# Altium PCB PCB1.PcbDoc (part 2 of 4)
Units mm, origin at the board's own origin, x right, y up, seen from the top; angles counter-clockwise.
Board outline 49 x 49 mm, 8 copper layers (L1(SIG), L2(GND), L3(SIG), L4(GND), L5(PWR), L6(PWR), L7(GND), L8(SIG)), stack 1.6 mm thick; 175 components, 123 nets, 646 pads, 355 vias.
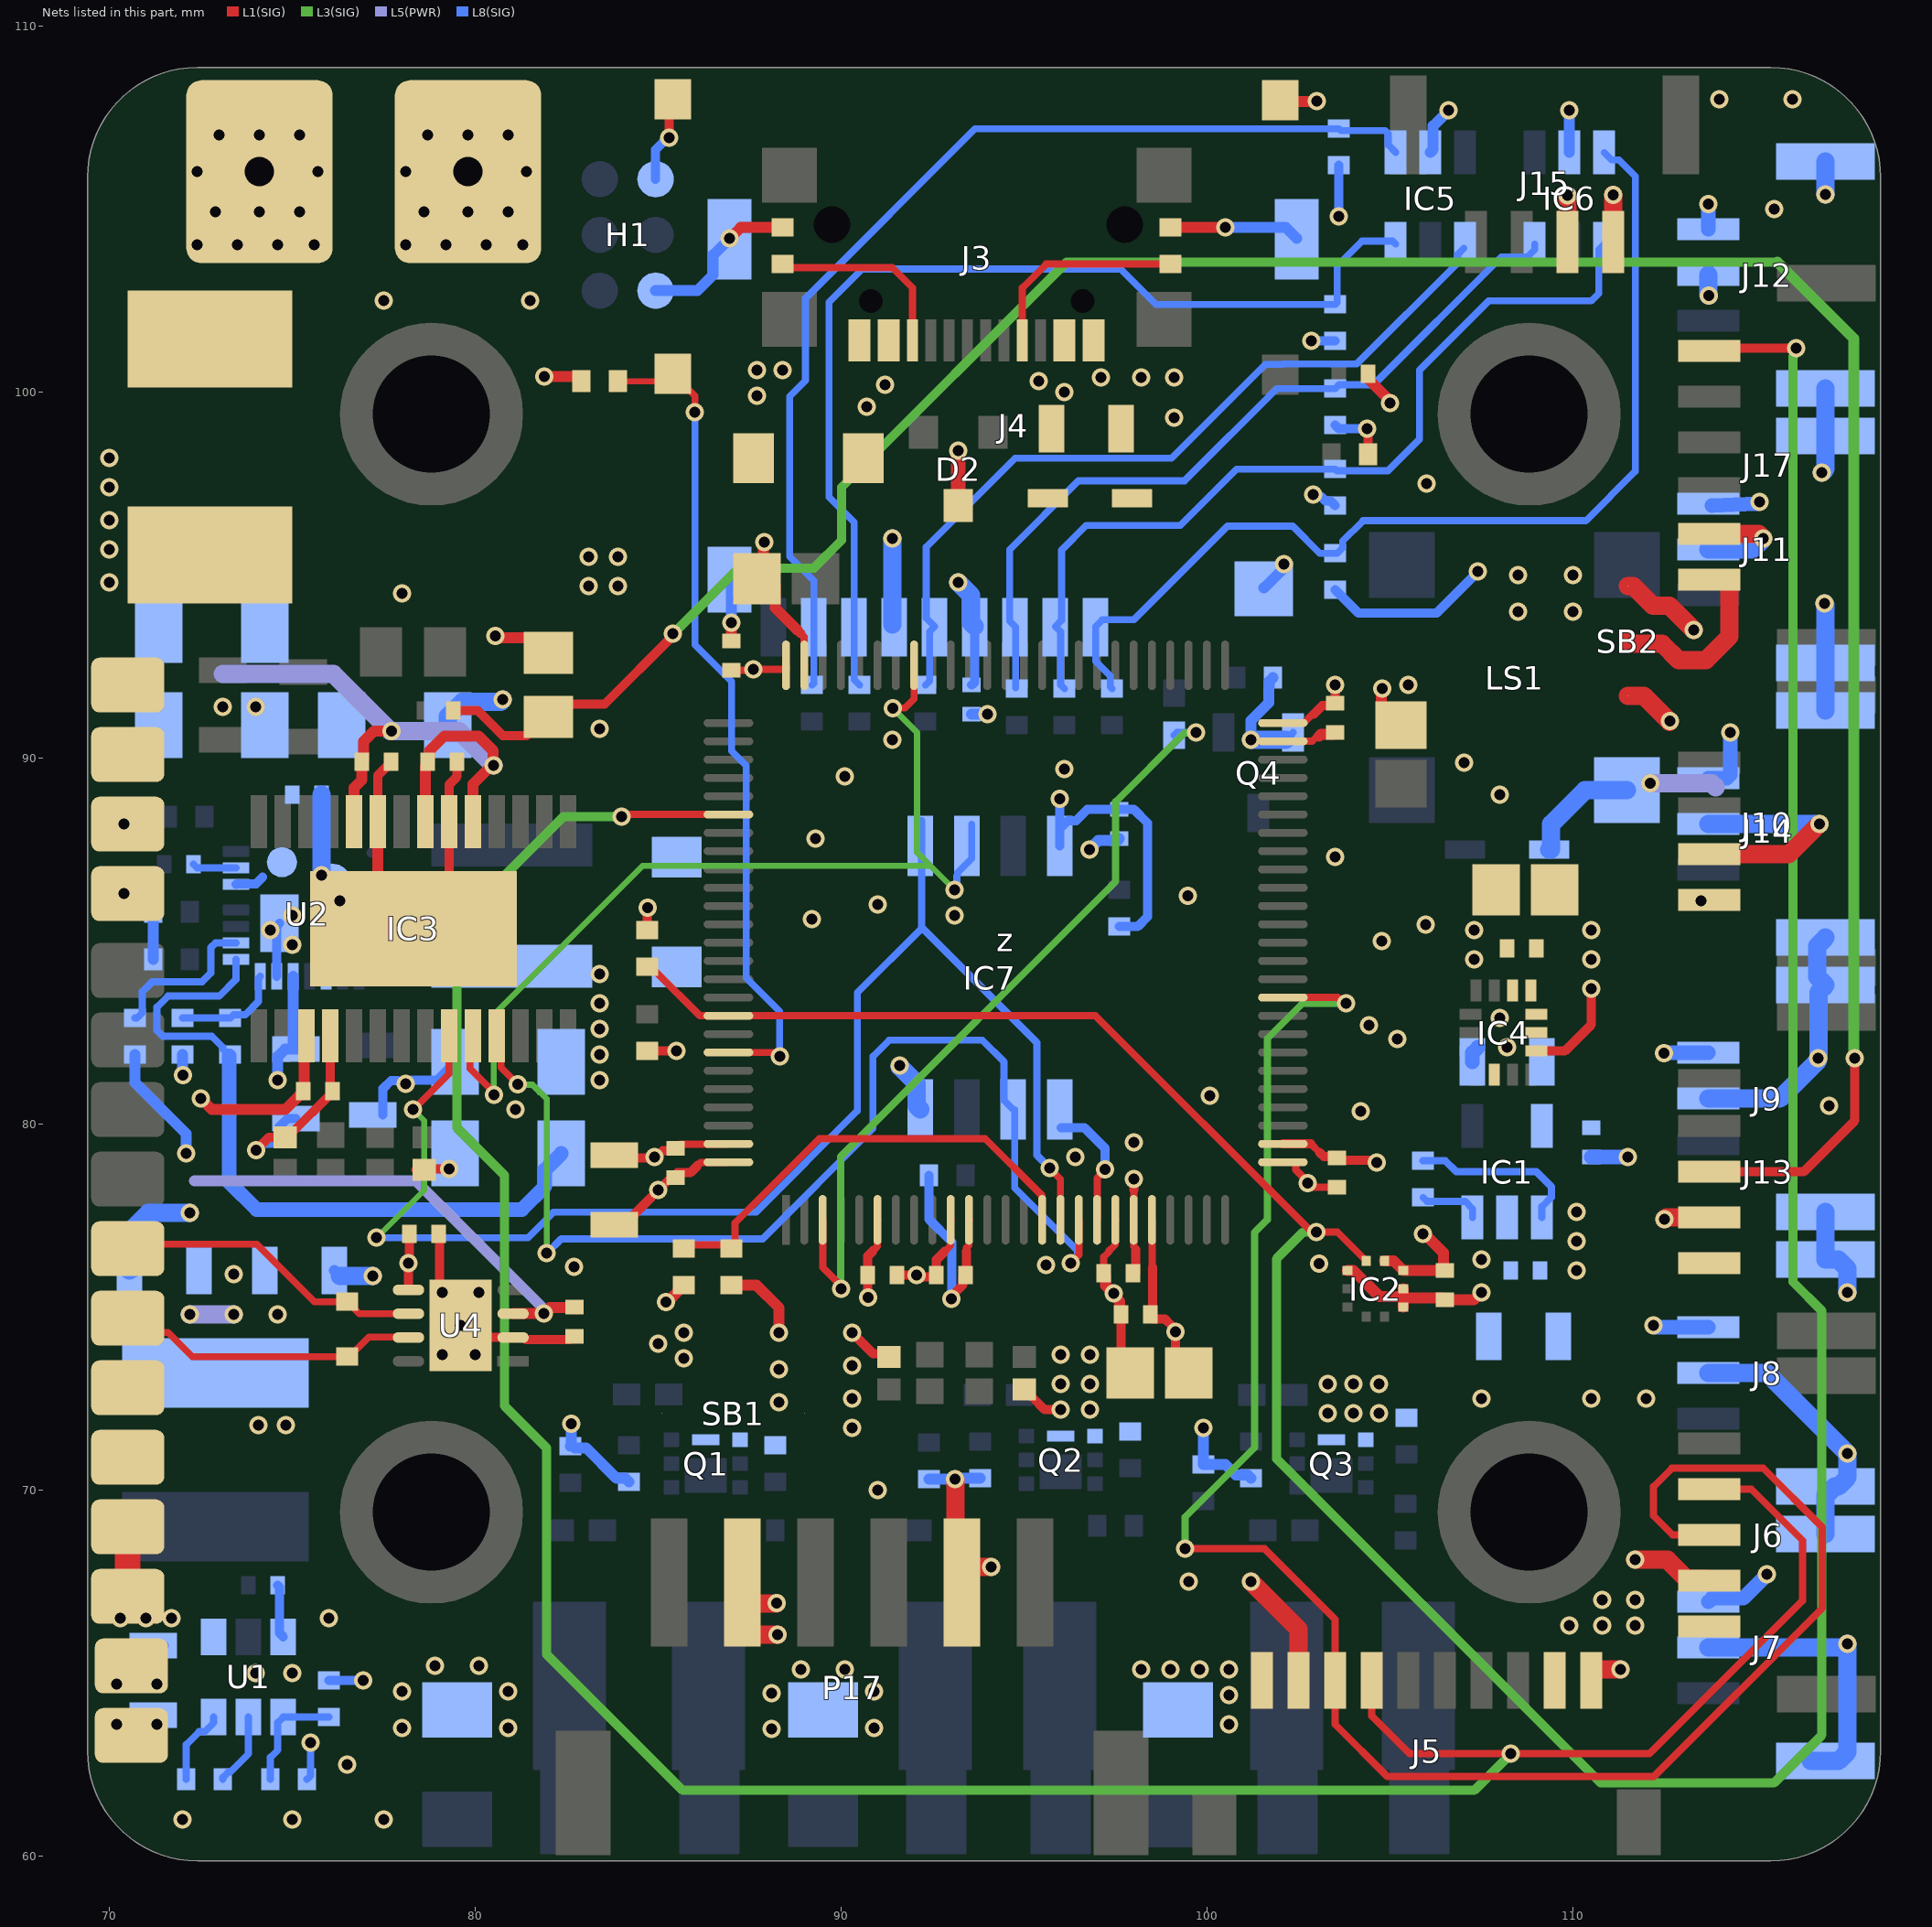
[diagram p8: the nets of this part, all layers, seen from the top]

## Part data (continued)
D1 D8: library part PESD24VS1UA,115, "Diode ESD (Uni-directional)", Manufacturer_Name=Nexperia, Mouser Part Number=771-PESD24VS1UA115, Arrow Part Number=PESD24VS1UA,115, Arrow Price/Stock=https://www.arrow.com/en/products/pesd24vs1ua115/nexperia, Datasheet Link=https://assets.nexperia.com/documents/data-sheet/PESD24VS1UA.pdf, Height=1.1mm, Manufacturer_Part_Number=PESD24VS1UA,115, Mouser Price/Stock=https://www.mouser.co.uk/ProductDetail/Nexperia/PESD24VS1UA115?qs=A1cBxND5mHKZ%252BhkKKiwSEA%3D%3D
D2: "TVS Diode (Uni-directional)", Manufacturer_Name="Diodes Incorporated", Mouser Part Number=621-D1213A-02SOL-7, Arrow Part Number=D1213A-02SOL-7, Arrow Price/Stock=https://www.arrow.com/en/products/d1213a-02sol-7/diodes-incorporated?utm_currency=USD&region=nac, Datasheet Link=https://www.diodes.com//assets/Datasheets/D1213A-02SOL.pdf, Height=1.2mm, Manufacturer_Part_Number=D1213A-02SOL-7, Mouser Price/Stock=https://www.mouser.co.uk/ProductDetail/Diodes-Incorporated/D1213A-02SOL-7?qs=gfe7vQ8txpUT2qMa05IpnA%3D%3D
D3 D4: "Diode", Manufacturer_Name="Diodes Incorporated", Mouser Part Number=621-MBR230S1F-7, Arrow Part Number=MBR230S1F-7, Arrow Price/Stock=https://www.arrow.com/en/products/mbr230s1f-7/diodes-incorporated?region=nac, Datasheet Link=https://www.diodes.com/assets/Datasheets/MBR230S1F.pdf, Height=1.15mm, Manufacturer_Part_Number=MBR230S1F-7, Mouser Price/Stock=https://www.mouser.co.uk/ProductDetail/Diodes-Incorporated/MBR230S1F-7?qs=5V6w%252Be2aIqaf4rGxjeeHeQ%3D%3D
D5 D6 D7: library part SM0402RC, "LED RED CLEAR 0402 SMD", Current - Test=20mA, Device Package="0402 (1005 Metric)", Lens Color=Colorless, manufacturer="Bivar Inc.", Millicandela Rating=90mcd, Supplier Device Package=0402, Supplier Part Number 1=492-2208-1-ND, Voltage - Forward (Vf) (Typ)=2.1V, Color=Red, componentlink1description=Datasheet, componentlink1url=https://www.bivar.com/Files/Datasheets/SM0402RC.pdf, componentlink2description="DigiKey Link", componentlink2url=https://www.digikey.com/en/products/detail/bivar-inc/SM0402RC/6810864, Configuration=0402, Height (Max)=0.71mm, lastupdated="6/3/2024 7:59:17 PM", Lens Size="0.50mm x 1.00mm", Lens Style="Rectangle with Flat Top", Lens Transparency=Clear, Lifecycle Status=Active, Minimum Order=1, Mounting Type="Surface Mount", Package / Case="0402 (1005 Metric)", packaging=TapeAndReel, Part Number=SM0402RC, Part Status=Active, partid=509, price=0.16, series=-, Size / Dimension="1.00mm L x 0.50mm W", Supplier 1=DigiKey, Viewing Angle=130°, Wavelength - Dominant=631nm, Wavelength - Peak=645nm
F1 F2 F3: library part CMP-005-00014-1, "Fuse Chip Fast Acting 10A 24V SMD Solder Pad 1206 T/R CSA/UL/cULus", Case/Package=1206, Current Rating=10A, Max Operating Temperature=125°C, Min Operating Temperature=-55°C, Mounting Technology="Surface Mount", Pins=2
H1: library part CMP-002-00084-1
IC1: "Integrated Circuit", Manufacturer_Name="Texas Instruments", Mouser Part Number=595-TLV74033PDBVR, Arrow Part Number=TLV74033PDBVR, Arrow Price/Stock=https://www.arrow.com/en/products/tlv74033pdbvr/texas-instruments?utm_currency=USD&region=nac, Datasheet Link=https://www.ti.com/lit/ds/symlink/tlv740p.pdf?ts=1599647884466&ref_url=https%253A%252F%252Fwww.ti.com%252Fpower-management%252Flinear-regulators-ldo%252Fproducts.html, Height=1.45mm, Manufacturer_Part_Number=TLV74033PDBVR, Mouser Price/Stock=https://www.mouser.co.uk/ProductDetail/Texas-Instruments/TLV74033PDBVR?qs=sPbYRqrBIVkaG2WMvPh1eg%3D%3D
IC2: "Integrated Circuit", Manufacturer_Name=BOSCH, Mouser Part Number=262-BMP390, Arrow Part Number=BMP390, Arrow Price/Stock=https://www.arrow.com/en/products/bmp390/bosch-sensortec?utm_currency=USD&region=nac, Datasheet Link=https://www.bosch-sensortec.com/media/boschsensortec/downloads/datasheets/bst-bmp390-ds002.pdf, Height=0.8mm, Manufacturer_Part_Number=BMP390, Mouser Price/Stock=https://www.mouser.co.uk/ProductDetail/Bosch-Sensortec/BMP390?qs=QNEnbhJQKvYQVfvRMgo2YA%3D%3D
IC3: "Integrated Circuit", Manufacturer_Name="Analog Devices", Mouser Part Number=700-MAX7456EUI, Datasheet Link=http://uk.rs-online.com/web/p/products/7326970, Height=1.1mm, Manufacturer_Part_Number=MAX7456EUI+, Mouser Price/Stock=https://www.mouser.co.uk/ProductDetail/Analog-Devices-Maxim-Integrated/MAX7456EUI%2b?qs=1THa7WoU59EGj4X9409NRQ%3D%3D
IC4: "Integrated Circuit", Manufacturer_Name=TDK, Mouser Part Number=410-ICM-42688-P, Arrow Part Number=ICM-42688-P, Arrow Price/Stock=https://www.arrow.com/en/products/icm-42688-p/invensense?utm_currency=USD&region=nac, Datasheet Link=https://3cfeqx1hf82y3xcoull08ihx-wpengine.netdna-ssl.com/wp-content/uploads/2021/06/DS-000347-ICM-42688-P-v1.5.pdf, Manufacturer_Part_Number=ICM-42688-P, Mouser Price/Stock=https://www.mouser.co.uk/ProductDetail/TDK-InvenSense/ICM-42688-P?qs=OlC7AqGiEDk8QrNAV728zw%3D%3D
IC5 IC6: "Integrated Circuit", Manufacturer_Name="Texas Instruments", Mouser Part Number=595-TPD4E001RDBVR, Arrow Part Number=TPD4E001RDBVR, Arrow Price/Stock=https://www.arrow.com/en/products/tpd4e001rdbvr/texas-instruments?utm_currency=USD&region=nac, Datasheet Link=http://www.ti.com/lit/gpn/TPD4E001, Height=1.45mm, Manufacturer_Part_Number=TPD4E001RDBVR, Mouser Price/Stock=https://www.mouser.co.uk/ProductDetail/Texas-Instruments/TPD4E001RDBVR?qs=P1JMDcb91o7xMbcYcXI1uw%3D%3D
IC7: "Integrated Circuit", Manufacturer_Name=Macronix, Mouser Part Number=N/A, Arrow Part Number=MX25L25645GM2I-08G, Arrow Price/Stock=https://www.arrow.com/en/products/mx25l25645gm2i-08g/macronix-international?utm_currency=USD&region=nac, Datasheet Link=https://www.farnell.com/datasheets/2815324.pdf, Height=2.16mm, Manufacturer_Part_Number=MX25L25645GM2I-08G, Mouser Price/Stock=https://www.mouser.co.uk/ProductDetail/Macronix/MX25L25645GM2I-08G?qs=Z%252BL2brAPG1Ifpgm4Amotqg%3D%3D
J1 J2: library part CMP-002-00080-1, "Solerd Pad 4x5mm mainly for Flight Controller Vbatt"
J3: "Connector", Manufacturer_Name="Same Sky", Mouser Part Number=179-UJ20CHGSMT5P16TR, Arrow Part Number=UJ20-C-H-G-SMT-5-P16-TR, Arrow Price/Stock=https://www.arrow.com/en/products/uj20-c-h-g-smt-5-p16-tr/cui-devices?utm_currency=USD&region=nac, Datasheet Link=https://www.sameskydevices.com/product/resource/UJ20-C-H-G-SMT-5-P16-TR.pdf, Height=3.41mm, Manufacturer_Part_Number=UJ20-C-H-G-SMT-5-P16-TR, Mouser Price/Stock=https://www.mouser.co.uk/ProductDetail/Same-Sky/UJ20-C-H-G-SMT-5-P16-TR?qs=IKkN%2F947nfD2hE8asV9%252BEg%3D%3D
J4: "Connector", Manufacturer_Name="Same Sky", Mouser Part Number=179-MSD-1-A, Arrow Part Number=MSD-1-A, Arrow Price/Stock=https://www.arrow.com/en/products/msd-1-a/cui-devices?utm_currency=USD&region=nac, Datasheet Link=https://www.sameskydevices.com/product/resource/msd-1-a.pdf, Height=2mm, Manufacturer_Part_Number=MSD-1-A, Mouser Price/Stock=https://www.mouser.co.uk/ProductDetail/Same-Sky/MSD-1-A?qs=Z%252BL2brAPG1Ip18XLC4tUPQ%3D%3D
J5: "Connector", Arrow Part Number=SM10B-SRSS-TB(LF)(SN), Manufacturer_Name="JST (JAPAN SOLDERLESS TERMINALS)", Mouser Part Number=306-SM10BSRSSTBLFSN, Arrow Price/Stock=https://www.arrow.com/en/products/sm10b-srss-tb-lf-sn/jst-manufacturing?utm_currency=USD&region=europe, Datasheet Link=http://www.jst-mfg.com/product/pdf/eng/eSR.pdf, Manufacturer_Part_Number=SM10B-SRSS-TB(LF)(SN), Mouser Price/Stock=https://www.mouser.co.uk/ProductDetail/JST-Commercial/SM10B-SRSS-TBLFSN?qs=QpmGXVUTftHkZAI%2F8hE40w%3D%3D
J6: library part SM05B-GHS-TB_LF__SN_, "Connector", Arrow Part Number=SM05B-GHS-TB(LF)(SN), Manufacturer_Name="JST (JAPAN SOLDERLESS TERMINALS)", Mouser Part Number=N/A, Arrow Price/Stock=https://www.arrow.com/en/products/sm05b-ghs-tb-lf-sn/jst-manufacturing?utm_currency=USD&region=europe, Datasheet Link=https://datasheet.datasheetarchive.com/originals/distributors/Datasheets_SAMA/e4ef010dc292ea31091454f6c0afb63a.pdf, Manufacturer_Part_Number=SM05B-GHS-TB(LF)(SN), Mouser Price/Stock=https://www.mouser.co.uk/ProductDetail/JST-Commercial/SM05B-GHS-TBLFSN?qs=QpmGXVUTftEjojOT4U3d6Q%3D%3D
J7 J8 J9 J10 J11 J12: library part CMP-002-00093-1, "MCU 32-bit LPC1800 ARM Cortex M3 RISC 1024KB Flash 3.3V 100-Pin TFBGA Tray", Max Operating Temperature=85°C, Min Operating Temperature=-25°C, Voltage Rating=50V, Connector Type="Male Pin, Outer Shroud Contact", Gender=Male, Mounting Technology="Surface Mount", Pins=3
J13: "Connector", Arrow Part Number=SM05B-GHS-TB(LF)(SN), Manufacturer_Name="JST (JAPAN SOLDERLESS TERMINALS)", Mouser Part Number=N/A, Arrow Price/Stock=https://www.arrow.com/en/products/sm05b-ghs-tb-lf-sn/jst-manufacturing?utm_currency=USD&region=europe, Datasheet Link=https://datasheet.datasheetarchive.com/originals/distributors/Datasheets_SAMA/e4ef010dc292ea31091454f6c0afb63a.pdf, Manufacturer_Part_Number=SM05B-GHS-TB(LF)(SN), Mouser Price/Stock=https://www.mouser.co.uk/ProductDetail/JST-Commercial/SM05B-GHS-TBLFSN?qs=QpmGXVUTftEjojOT4U3d6Q%3D%3D
J14 J15: "Connector", Arrow Part Number=SM04B-GHS-TB(LF)(SN), Manufacturer_Name="JST (JAPAN SOLDERLESS TERMINALS)", Mouser Part Number=N/A, Arrow Price/Stock=https://www.arrow.com/en/products/sm04b-ghs-tb-lf-sn-/jst-manufacturing?region=europe, Datasheet Link=http://uk.rs-online.com/web/p/products/7521797, Manufacturer_Part_Number=SM04B-GHS-TB(LF)(SN), Mouser Price/Stock=https://www.mouser.co.uk/ProductDetail/JST-Commercial/SM04B-GHS-TBLFSN?qs=QpmGXVUTftEJzKB1YHGCXw%3D%3D
J16 J18 J19 J20 J21 J22: "Connector", Manufacturer_Name=Wago, Manufacturer_Part_Number=2065-101/998-403, Datasheet Link=https://www.farnell.com/datasheets/2849884.pdf?_gl=1*d6n7fb*_gcl_au*MTg5NzcyMzM3OS4xNzU0MjQ4OTUy, Height=2.7mm
J17: "Connector", Arrow Part Number=SM06B-GHS-TB(LF)(SN), Manufacturer_Name="JST (JAPAN SOLDERLESS TERMINALS)", Mouser Part Number=N/A, Arrow Price/Stock=https://www.arrow.com/en/products/sm06b-ghs-tb-lf-sn/jst-manufacturing, Datasheet Link=https://datasheet.datasheetarchive.com/originals/distributors/Datasheets_SAMA/e4ef010dc292ea31091454f6c0afb63a.pdf, Manufacturer_Part_Number=SM06B-GHS-TB(LF)(SN), Mouser Price/Stock=https://www.mouser.co.uk/ProductDetail/JST-Commercial/SM06B-GHS-TBLFSN?qs=QpmGXVUTftFzTQe43vH9Ig%3D%3D
L1: "Inductor", Manufacturer_Name=TDK, Mouser Part Number=810-VLS6045EX-150M, Arrow Part Number=VLS6045EX-150M, Arrow Price/Stock=https://www.arrow.com/en/products/vls6045ex-150m/tdk?region=nac, Datasheet Link=https://product.tdk.com/system/files/dam/doc/product/inductor/inductor/smd/catalog/inductor_commercial_power_vls6045ex_en.pdf, Manufacturer_Part_Number=VLS6045EX-150M, Mouser Price/Stock=https://www.mouser.co.uk/ProductDetail/TDK/VLS6045EX-150M?qs=oF%2FSscNnLpDh4m%2FVdQ%2FgKQ%3D%3D
L2: "Inductor", Manufacturer_Name=COILCRAFT, Mouser Part Number=994-XAL5030-222MEC, Datasheet Link=https://www.coilcraft.com/getmedia/49bc46c8-4b2c-45b9-9b6c-2eaa235ea698/xal50xx.pdf, Height=3.1mm, Manufacturer_Part_Number=XAL5030-222MEC, Mouser Price/Stock=https://www.mouser.co.uk/ProductDetail/Coilcraft/XAL5030-222MEC?qs=zCSbvcPd3pamMZlPWCpd5A%3D%3D
LS1: "Loudspeaker or Buzzer", Manufacturer_Name="Same Sky", Mouser Part Number=179-CMT-7525-03SMTTR, Datasheet Link=https://www.sameskydevices.com/product/resource/CMT-7525-03-SMT-TR.pdf, Height=2.7mm, Manufacturer_Part_Number=CMT-7525-03-SMT-TR, Mouser Price/Stock=https://www.mouser.co.uk/ProductDetail/Same-Sky/CMT-7525-03-SMT-TR?qs=olJun0bQHM86ULzT6E8ouQ%3D%3D
P1 P2 P3 P4 P5 P6 P7 P8 P9 P10 P11 P12 P13 P14 P15 P16: library part CMP-00001-1, "Solder Pad 2x1.5mm, 0.5mm hole"
P17: library part CMP-002-00086-2, "Connector Header, PH Series, 6 Position, Side Entry, 2.00mm, Solder, Surface Mount, Natural.", Max Current Rating=2A, Max Operating Temperature=85°C, Min Operating Temperature=-25°C, Voltage Rating=100V, Connector Type="Male Pin", Gender=Male, Mounting Technology="Surface Mount", Pins=6
Q1 Q2 Q3: "MOSFET (N-Channel)", Manufacturer_Name=Toshiba, Mouser Part Number=757-SSM6K513NULF, Arrow Part Number=SSM6K513NU,LF, Arrow Price/Stock=https://www.arrow.com/en/products/ssm6k513nulf/toshiba?region=nac, Datasheet Link=https://toshiba.semicon-storage.com/info/docget.jsp?did=53148&prodName=SSM6K513NU, Height=0.8mm, Manufacturer_Part_Number=SSM6K513NU,LF, Mouser Price/Stock=https://www.mouser.co.uk/ProductDetail/Toshiba/SSM6K513NULF?qs=zPgndZZmKGbOGaIT7oO3Dw%3D%3D
Q4: "MOSFET (N-Channel)", Manufacturer_Name=Nexperia, Mouser Part Number=771-PMV20XNER, Arrow Part Number=PMV20XNER, Arrow Price/Stock=https://www.arrow.com/en/products/pmv20xner/nexperia?utm_currency=USD&region=nac, Datasheet Link=https://assets.nexperia.com/documents/data-sheet/PMV20XNE.pdf, Height=1.1mm, Manufacturer_Part_Number=PMV20XNER, Mouser Price/Stock=https://www.mouser.co.uk/ProductDetail/Nexperia/PMV20XNER?qs=%252BRKXB2WKlSevPnXiP0DAaQ%3D%3D
R1 R4 R5 R6 R13: library part AC0402DR-0710KL, "RES 10K OHM 0.5% 1/16W 0402", Device Package="0402 (1005 Metric)", manufacturer=Yageo, Operating Temperature="-55°C ~ 155°C", Power (Watts)="0.063W, 1/16W", Ratings=AEC-Q200, Resistance="10 kOhms", Supplier Device Package=0402, Supplier Part Number 1=13-AC0402DR-0710KLCT-ND, Temperature Coefficient=±100ppm/°C, Tolerance=±0.5%, componentlink1description=Datasheet, componentlink1url=https://www.yageo.com/upload/media/product/productsearch/datasheet/rchip/PYu-AC_51_RoHS_L_9.pdf, componentlink2description="DigiKey Link", componentlink2url=https://www.digikey.com/en/products/detail/yageo/AC0402DR-0710KL/16990352, Composition="Thick Film", Features="Automotive AEC-Q200, Moisture Resistant", Height - Seated (Max)="0.015\" (0.37mm)", lastupdated="8/31/2025 3:03:41 PM", Lifecycle Status=Active, Minimum Order=1, Number of Terminations=2, Package / Case="0402 (1005 Metric)", packaging=TapeAndReel, Part Number=AC0402DR-0710KL, Part Status=Active, partid=77661, price=0.01, series=AC, Size / Dimension="0.039\" L x 0.020\" W (1.00mm x 0.50mm)", Supplier 1=DigiKey
R2 R3: library part AC0402FR-134K7L, "RES 4.7K OHM 1% 1/16W 0402", Device Package="0402 (1005 Metric)", manufacturer=Yageo, Operating Temperature="-55°C ~ 155°C", Power (Watts)="0.063W, 1/16W", Ratings=AEC-Q200, Resistance="4.7 kOhms", Supplier Device Package=0402, Supplier Part Number 1=13-AC0402FR-134K7LCT-ND, Temperature Coefficient=±100ppm/°C, Tolerance=±1%, componentlink1description=Datasheet, componentlink1url=https://www.yageo.com/upload/media/product/productsearch/datasheet/rchip/PYu-AC_51_RoHS_L_8.pdf, componentlink2description="DigiKey Link", componentlink2url=https://www.digikey.com/en/products/detail/yageo/AC0402FR-134K7L/14008367, Composition="Thick Film", Height - Seated (Max)="0.015\" (0.37mm)", lastupdated="8/31/2025 3:03:54 PM", Lifecycle Status=Active, Minimum Order=1, Number of Terminations=2, Package / Case="0402 (1005 Metric)", packaging=CutTape, Part Number=AC0402FR-134K7L, Part Status=Active, partid=65258, price=0.01, series=AC, Size / Dimension="0.039\" L x 0.020\" W (1.00mm x 0.50mm)", Supplier 1=DigiKey
R7: library part AC0402FR-07182KL, "RES SMD 182K OHM 1% 1/16W 0402", Device Package="0402 (1005 Metric)", manufacturer=Yageo, Operating Temperature="-55°C ~ 155°C", Power (Watts)="0.063W, 1/16W", Ratings=AEC-Q200, Resistance="182 kOhms", Supplier Device Package=0402, Supplier Part Number 1=13-AC0402FR-07182KLCT-ND, Temperature Coefficient=±100ppm/°C, Tolerance=±1%, componentlink1description=Datasheet, componentlink1url=https://www.yageo.com/upload/media/product/productsearch/datasheet/rchip/PYu-AC_51_RoHS_L_10.pdf, componentlink2description="DigiKey Link", componentlink2url=https://www.digikey.com/en/products/detail/yageo/AC0402FR-07182KL/5895110, Composition="Thick Film", Features="Automotive AEC-Q200, Moisture Resistant", Height - Seated (Max)="0.015\" (0.37mm)", lastupdated="8/31/2025 3:03:39 PM", Lifecycle Status=Active, Minimum Order=1, Number of Terminations=2, Package / Case="0402 (1005 Metric)", packaging=CutTape, Part Number=AC0402FR-07182KL, partid=79430, price=0.01, series=AC, Size / Dimension="0.039\" L x 0.020\" W (1.00mm x 0.50mm)", Supplier 1=DigiKey
R8: library part AC0402FR-0762KL, "RES SMD 62K OHM 1% 1/16W 0402", Device Package="0402 (1005 Metric)", manufacturer=Yageo, Operating Temperature="-55°C ~ 155°C", Power (Watts)="0.063W, 1/16W", Ratings=AEC-Q200, Resistance="62 kOhms", Supplier Device Package=0402, Supplier Part Number 1=13-AC0402FR-0762KLCT-ND, Temperature Coefficient=±100ppm/°C, Tolerance=±1%, componentlink1description=Datasheet, componentlink1url=https://www.yageo.com/upload/media/product/productsearch/datasheet/rchip/PYu-AC_51_RoHS_L_8.pdf, componentlink2description="DigiKey Link", componentlink2url=https://www.digikey.com/en/products/detail/yageo/AC0402FR-0762KL/5895460, Composition="Thick Film", Features="Automotive AEC-Q200, Moisture Resistant", Height - Seated (Max)="0.015\" (0.37mm)", lastupdated="8/31/2025 3:03:55 PM", Lifecycle Status=Active, Minimum Order=1, Number of Terminations=2, Package / Case="0402 (1005 Metric)", packaging=CutTape, Part Number=AC0402FR-0762KL, Part Status=Active, partid=60448, price=0.01, series=AC, Size / Dimension="0.039\" L x 0.020\" W (1.00mm x 0.50mm)", Supplier 1=DigiKey
R9: library part AC0402FR-072R2L, "RES SMD 2.2 OHM 1% 1/16W 0402", Device Package="0402 (1005 Metric)", manufacturer=Yageo, Operating Temperature="-55°C ~ 155°C", Power (Watts)="0.063W, 1/16W", Ratings=AEC-Q200, Resistance="2.2 Ohms", Supplier Device Package=0402, Supplier Part Number 1=YAG3471CT-ND, Temperature Coefficient=±200ppm/°C, Tolerance=±1%, componentlink1description=Datasheet, componentlink1url=https://www.yageo.com/upload/media/product/productsearch/datasheet/rchip/PYu-AC_51_RoHS_L_7.pdf, componentlink2description="DigiKey Link", componentlink2url=https://www.digikey.com/en/products/detail/yageo/AC0402FR-072R2L/5895264, Composition="Thick Film", Features="Automotive AEC-Q200, Moisture Resistant", Height - Seated (Max)="0.015\" (0.37mm)", lastupdated="8/31/2025 3:04:17 PM", Lifecycle Status=Active, Minimum Order=1, Number of Terminations=2, Package / Case="0402 (1005 Metric)", packaging=CutTape, Part Number=AC0402FR-072R2L, Part Status=Active, partid=3440, price=0.01, series=AC, Size / Dimension="0.039\" L x 0.020\" W (1.00mm x 0.50mm)", Supplier 1=DigiKey
R10: library part AC0402FR-0773K2L, "RES SMD 73.2K OHM 1% 1/16W 0402", Device Package="0402 (1005 Metric)", manufacturer=Yageo, Operating Temperature="-55°C ~ 155°C", Power (Watts)="0.063W, 1/16W", Ratings=AEC-Q200, Resistance="73.2 kOhms", Supplier Device Package=0402, Supplier Part Number 1=YAG5685CT-ND, Temperature Coefficient=±100ppm/°C, Tolerance=±1%, componentlink1description=Datasheet, componentlink1url=https://www.yageo.com/upload/media/product/productsearch/datasheet/rchip/PYu-AC_51_RoHS_L_7.pdf, componentlink2description="DigiKey Link", componentlink2url=https://www.digikey.com/en/products/detail/yageo/AC0402FR-0773K2L/5895501, Composition="Thick Film", Features="Automotive AEC-Q200, Moisture Resistant", Height - Seated (Max)="0.015\" (0.37mm)", lastupdated="8/31/2025 3:04:14 PM", Lifecycle Status=Active, Minimum Order=1, Number of Terminations=2, Package / Case="0402 (1005 Metric)", packaging=CutTape, Part Number=AC0402FR-0773K2L, Part Status=Active, partid=5215, price=0.01, series=AC, Size / Dimension="0.039\" L x 0.020\" W (1.00mm x 0.50mm)", Supplier 1=DigiKey
R11 R12: library part AC0402JR-07100KL, "RES SMD 100K OHM 5% 1/16W 0402", Device Package="0402 (1005 Metric)", manufacturer=Yageo, Operating Temperature="-55°C ~ 155°C", Power (Watts)="0.063W, 1/16W", Ratings=AEC-Q200, Resistance="100 kOhms", Supplier Device Package=0402, Supplier Part Number 1=YAG3515CT-ND, Temperature Coefficient=±100ppm/°C, Tolerance=±5%, componentlink1description=Datasheet, componentlink1url=https://www.yageo.com/upload/media/product/productsearch/datasheet/rchip/PYu-AC_51_RoHS_L_7.pdf, componentlink2description="DigiKey Link", componentlink2url=https://www.digikey.com/en/products/detail/yageo/AC0402JR-07100KL/5895569, Composition="Thick Film", Features="Automotive AEC-Q200, Moisture Resistant", Height - Seated (Max)="0.015\" (0.37mm)", lastupdated="8/31/2025 3:04:17 PM", Lifecycle Status=Active, Minimum Order=1, Number of Terminations=2, Package / Case="0402 (1005 Metric)", packaging=CutTape, Part Number=AC0402JR-07100KL, Part Status=Active, partid=3380, price=0.01, series=AC, Size / Dimension="0.039\" L x 0.020\" W (1.00mm x 0.50mm)", Supplier 1=DigiKey
R14: library part AC0402JR-07200KL, "RES SMD 200K OHM 5% 1/16W 0402", Device Package="0402 (1005 Metric)", manufacturer=Yageo, Operating Temperature="-55°C ~ 155°C", Power (Watts)="0.063W, 1/16W", Ratings=AEC-Q200, Resistance="200 kOhms", Supplier Device Package=0402, Supplier Part Number 1=13-AC0402JR-07200KLCT-ND, Temperature Coefficient=±100ppm/°C, Tolerance=±5%, componentlink1description=Datasheet, componentlink1url=https://www.yageo.com/upload/media/product/productsearch/datasheet/rchip/PYu-AC_51_RoHS_L_8.pdf, componentlink2description="DigiKey Link", componentlink2url=https://www.digikey.com/en/products/detail/yageo/AC0402JR-07200KL/5895618, Composition="Thick Film", Features="Automotive AEC-Q200, Moisture Resistant", Height - Seated (Max)="0.015\" (0.37mm)", lastupdated="8/31/2025 3:03:52 PM", Lifecycle Status=Active, Minimum Order=1, Number of Terminations=2, Package / Case="0402 (1005 Metric)", packaging=CutTape, Part Number=AC0402JR-07200KL, Part Status=Active, partid=65183, price=0.01, series=AC, Size / Dimension="0.039\" L x 0.020\" W (1.00mm x 0.50mm)", Supplier 1=DigiKey
R15 R16: library part AC0402JR-075K1L, "RES SMD 5.1K OHM 5% 1/16W 0402", Device Package="0402 (1005 Metric)", manufacturer=Yageo, Operating Temperature="-55°C ~ 155°C", Power (Watts)="0.063W, 1/16W", Ratings=AEC-Q200, Resistance="5.1 kOhms", Supplier Device Package=0402, Supplier Part Number 1=YAG3554CT-ND, Temperature Coefficient=±100ppm/°C, Tolerance=±5%, componentlink1description=Datasheet, componentlink1url=https://www.yageo.com/upload/media/product/productsearch/datasheet/rchip/PYu-AC_51_RoHS_L_7.pdf, componentlink2description="DigiKey Link", componentlink2url=https://www.digikey.com/en/products/detail/yageo/AC0402JR-075K1L/5895695, Composition="Thick Film", Features="Automotive AEC-Q200, Moisture Resistant", Height - Seated (Max)="0.015\" (0.37mm)", lastupdated="8/31/2025 3:04:16 PM", Lifecycle Status=Active, Minimum Order=1, Number of Terminations=2, Package / Case="0402 (1005 Metric)", packaging=CutTape, Part Number=AC0402JR-075K1L, Part Status=Active, partid=4690, price=0.01, series=AC, Size / Dimension="0.039\" L x 0.020\" W (1.00mm x 0.50mm)", Supplier 1=DigiKey
R17 R18 R20: library part AC0402FR-7W4K7L, "RES 4.7K OHM 1% 1/8W 0402", Device Package="0402 (1005 Metric)", manufacturer=Yageo, Operating Temperature="-55°C ~ 155°C", Power (Watts)="0.125W, 1/8W", Ratings=AEC-Q200, Resistance="4.7 kOhms", Supplier Device Package=0402, Supplier Part Number 1=13-AC0402FR-7W4K7LCT-ND, Temperature Coefficient=±100ppm/°C, Tolerance=±1%, componentlink1description=Datasheet, componentlink1url=https://www.yageo.com/upload/media/product/productsearch/datasheet/rchip/PYu-AC_51_RoHS_L_10.pdf, componentlink2description="DigiKey Link", componentlink2url=https://www.digikey.com/en/products/detail/yageo/AC0402FR-7W4K7L/17009027, Composition="Thick Film", Features="Automotive AEC-Q200, Moisture Resistant", Height - Seated (Max)="0.015\" (0.37mm)", lastupdated="8/31/2025 3:03:39 PM", Lifecycle Status=Active, Minimum Order=1, Number of Terminations=2, Package / Case="0402 (1005 Metric)", packaging=CutTape, Part Number=AC0402FR-7W4K7L, partid=78681, price=0.01, series=AC, Size / Dimension="0.039\" L x 0.020\" W (1.00mm x 0.50mm)", Supplier 1=DigiKey
R19: library part AA0402FR-07100KL, "RES SMD 100K OHM 1% 1/16W 0402", Device Package="0402 (1005 Metric)", manufacturer=Yageo, Operating Temperature="-55°C ~ 155°C", Power (Watts)="0.063W, 1/16W", Ratings=AEC-Q200, Resistance="100 kOhms", Supplier Device Package=0402, Supplier Part Number 1=13-AA0402FR-07100KLCT-ND, Temperature Coefficient=±150ppm/°C, Tolerance=±1%, componentlink1description=Datasheet, componentlink1url=https://www.yageo.com/upload/media/product/productsearch/datasheet/rchip/PYu-AA_51_RoHS_L_3.pdf, componentlink2description="DigiKey Link", componentlink2url=https://www.digikey.com/en/products/detail/yageo/AA0402FR-07100KL/5887718, Composition="Thick Film", Features="Anti-Sulfur, Automotive AEC-Q200, Moisture Resistant", Height - Seated (Max)="0.015\" (0.37mm)", lastupdated="8/31/2025 3:03:39 PM", Lifecycle Status=Active, Minimum Order=1, Number of Terminations=2, Package / Case="0402 (1005 Metric)", packaging=CutTape, Part Number=AA0402FR-07100KL, partid=78675, price=0.01, series=AA, Size / Dimension="0.039\" L x 0.020\" W (1.00mm x 0.50mm)", Supplier 1=DigiKey
R21: library part AC0402FR-0713KL, "RES SMD 13K OHM 1% 1/16W 0402", Device Package="0402 (1005 Metric)", manufacturer=Yageo, Operating Temperature="-55°C ~ 155°C", Power (Watts)="0.063W, 1/16W", Ratings=AEC-Q200, Resistance="13 kOhms", Supplier Device Package=0402, Supplier Part Number 1=13-AC0402FR-0713KLCT-ND, Temperature Coefficient=±100ppm/°C, Tolerance=±1%, componentlink1description=Datasheet, componentlink1url=https://www.yageo.com/upload/media/product/productsearch/datasheet/rchip/PYu-AC_51_RoHS_L_8.pdf, componentlink2description="DigiKey Link", componentlink2url=https://www.digikey.com/en/products/detail/yageo/AC0402FR-0713KL/5895068, Composition="Thick Film", Features="Automotive AEC-Q200, Moisture Resistant", Height - Seated (Max)="0.015\" (0.37mm)", lastupdated="8/31/2025 3:03:55 PM", Lifecycle Status=Active, Minimum Order=1, Number of Terminations=2, Package / Case="0402 (1005 Metric)", packaging=CutTape, Part Number=AC0402FR-0713KL, Part Status=Active, partid=60414, price=0.01, series=AC, Size / Dimension="0.039\" L x 0.020\" W (1.00mm x 0.50mm)", Supplier 1=DigiKey
R22 R25 R26 R50 R51 R52: library part AC0402FR-7W22RL, "RES 22 OHM 1% 1/8W 0402", Device Package="0402 (1005 Metric)", manufacturer=Yageo, Operating Temperature="-55°C ~ 155°C", Power (Watts)="0.125W, 1/8W", Ratings=AEC-Q200, Resistance="22 Ohms", Supplier Device Package=0402, Supplier Part Number 1=13-AC0402FR-7W22RLCT-ND, Temperature Coefficient=±100ppm/°C, Tolerance=±1%, componentlink1description=Datasheet, componentlink1url=https://www.yageo.com/upload/media/product/productsearch/datasheet/rchip/PYu-AC_51_RoHS_L_10.pdf, componentlink2description="DigiKey Link", componentlink2url=https://www.digikey.com/en/products/detail/yageo/AC0402FR-7W22RL/16992800, Composition="Thick Film", Features="Automotive AEC-Q200, Moisture Resistant", Height - Seated (Max)="0.015\" (0.37mm)", lastupdated="8/31/2025 3:03:07 PM", Lifecycle Status=Active, Minimum Order=1, Number of Terminations=2, Package / Case="0402 (1005 Metric)", packaging=CutTape, Part Number=AC0402FR-7W22RL, partid=90583, price=0.01, series=AC, Size / Dimension="0.039\" L x 0.020\" W (1.00mm x 0.50mm)", Supplier 1=DigiKey
R23 R29: library part CRG0805F75R, "RES SMD 75 OHM 1% 1/8W 0805", Device Package="0805 (2012 Metric)", manufacturer="TE Connectivity Passive Product", Operating Temperature="-55°C ~ 155°C", Power (Watts)="0.125W, 1/8W", Supplier Device Package=0805, Supplier Part Number 1=A126386CT-ND, Temperature Coefficient=±200ppm/°C, Tolerance=±1%, componentlink1description=Datasheet, componentlink1url=https://www.te.com/commerce/DocumentDelivery/DDEController?Action=srchrtrv&DocNm=1773204&DocType=DS&DocLang=English, componentlink2description="DigiKey Link", componentlink2url=https://www.digikey.com/en/products/detail/te-connectivity-passive-product/CRG0805F75R/2135489, Composition="Thick Film", Height - Seated (Max)="0.026\" (0.65mm)", lastupdated="2/8/2024 9:02:08 PM", Lifecycle Status=Active, Minimum Order=1, Number of Terminations=2, Package / Case="0805 (2012 Metric)", packaging=TapeAndReel, Part Number=CRG0805F75R, Part Status=Active, partid=34689, price=0.01, Resistance="75 Ohms", series="CRG, Neohm", Size / Dimension="0.079\" L x 0.049\" W (2.00mm x 1.25mm)", Supplier 1=DigiKey
R24 R40 R41 R42 R43 R45: library part AC0402FR-1310KL, "RES 10K OHM 1% 1/16W 0402", Device Package="0402 (1005 Metric)", manufacturer=Yageo, Operating Temperature="-55°C ~ 155°C", Power (Watts)="0.063W, 1/16W", Ratings=AEC-Q200, Resistance="10 kOhms", Supplier Device Package=0402, Supplier Part Number 1=13-AC0402FR-1310KLCT-ND, Temperature Coefficient=±100ppm/°C, Tolerance=±1%, componentlink1description=Datasheet, componentlink1url=https://www.yageo.com/upload/media/product/productsearch/datasheet/rchip/PYu-AC_51_RoHS_L_8.pdf, componentlink2description="DigiKey Link", componentlink2url=https://www.digikey.com/en/products/detail/yageo/AC0402FR-1310KL/12756397, Composition="Thick Film", Features="Automotive AEC-Q200, Moisture Resistant", Height - Seated (Max)="0.015\" (0.37mm)", lastupdated="8/31/2025 3:03:46 PM", Lifecycle Status=Active, Minimum Order=1, Number of Terminations=2, Package / Case="0402 (1005 Metric)", packaging=CutTape, Part Number=AC0402FR-1310KL, Part Status=Active, partid=69220, price=0.01, series=AC, Size / Dimension="0.039\" L x 0.020\" W (1.00mm x 0.50mm)", Supplier 1=DigiKey
R27 R28 R30 R48 R49: library part AC0402FR-7W47KL, "RES 47K OHM 1% 1/8W 0402", Device Package="0402 (1005 Metric)", manufacturer=Yageo, Operating Temperature="-55°C ~ 155°C", Power (Watts)="0.125W, 1/8W", Ratings=AEC-Q200, Resistance="47 kOhms", Supplier Device Package=0402, Supplier Part Number 1=13-AC0402FR-7W47KLCT-ND, Temperature Coefficient=±100ppm/°C, Tolerance=±1%, componentlink1description=Datasheet, componentlink1url=https://www.yageo.com/upload/media/product/productsearch/datasheet/rchip/PYu-AC_51_RoHS_L_10.pdf, componentlink2description="DigiKey Link", componentlink2url=https://www.digikey.com/en/products/detail/yageo/AC0402FR-7W47KL/17009967, Composition="Thick Film", Features="Automotive AEC-Q200, Moisture Resistant", Height - Seated (Max)="0.015\" (0.37mm)", lastupdated="8/31/2025 3:03:35 PM", Lifecycle Status=Active, Minimum Order=1, Number of Terminations=2, Package / Case="0402 (1005 Metric)", packaging=CutTape, Part Number=AC0402FR-7W47KL, partid=86207, price=0.01, series=AC, Size / Dimension="0.039\" L x 0.020\" W (1.00mm x 0.50mm)", Supplier 1=DigiKey
R31 R32 R33 R47: library part 504L1000FTNCFT, "RES SMD 100 OHM 1% 1/8W 0402", Device Package="0402 (1005 Metric)", manufacturer="American Technical Ceramics", Operating Temperature="-40°C ~ 125°C", Power (Watts)="0.125W, 1/8W", Resistance="100 Ohms", Supplier Device Package=0402, Supplier Part Number 1=1284-1327-1-ND, Temperature Coefficient="-50/ -150ppm/°C", Tolerance=±1%, componentlink1description=Datasheet, componentlink1url=http://www.atceramics.com/UserFiles/504L_ubr_resistor.pdf, componentlink2description="DigiKey Link", componentlink2url=http://digikey.com/product-detail/en/american-technical-ceramics/504L1000FTNCFT/1284-1327-1-ND/4789907, Composition="Thin Film", Features="RF, High Frequency", Height - Seated (Max)="0.024\" (0.60mm)", lastupdated="2/9/2024 8:30:03 PM", Lifecycle Status=Active, Minimum Order=1, Number of Terminations=2, Package / Case="0402 (1005 Metric)", packaging=TapeAndReel, Part Number=504L1000FTNCFT, Part Status=Active, partid=7485, price=1.53, series=ATC504, Size / Dimension="0.039\" L x 0.020\" W (1.00mm x 0.50mm)", Supplier 1=DigiKey
R34 R35 R36 R37 R38 R39: library part AC0402FR-13100KL, "RES 100K OHM 1% 1/16W 0402", Device Package="0402 (1005 Metric)", manufacturer=Yageo, Operating Temperature="-55°C ~ 155°C", Power (Watts)="0.063W, 1/16W", Ratings=AEC-Q200, Resistance="100 kOhms", Supplier Device Package=0402, Supplier Part Number 1=13-AC0402FR-13100KLCT-ND, Temperature Coefficient=±100ppm/°C, Tolerance=±1%, componentlink1description=Datasheet, componentlink1url=https://www.yageo.com/upload/media/product/productsearch/datasheet/rchip/PYu-AC_51_RoHS_L_8.pdf, componentlink2description="DigiKey Link", componentlink2url=https://www.digikey.com/en/products/detail/yageo/AC0402FR-13100KL/14008459, Composition="Thick Film", Features="Automotive AEC-Q200", Height - Seated (Max)="0.015\" (0.37mm)", lastupdated="8/31/2025 3:03:52 PM", Lifecycle Status=Active, Minimum Order=1, Number of Terminations=2, Package / Case="0402 (1005 Metric)", packaging=CutTape, Part Number=AC0402FR-13100KL, Part Status=Active, partid=65177, price=0.01, series=AC, Size / Dimension="0.039\" L x 0.020\" W (1.00mm x 0.50mm)", Supplier 1=DigiKey
R46: library part RK73H1JTTD1200F, "RES 120 OHM 1% 1/8W 0603", Device Package="0603 (1608 Metric)", manufacturer="KOA Speer Electronics, Inc.", Operating Temperature="-55°C ~ 155°C", Power (Watts)="0.125W, 1/8W", Ratings=AEC-Q200, Supplier Device Package=0603, Supplier Part Number 1=2019-RK73H1JTTD1200FCT-ND, Temperature Coefficient=±100ppm/°C, Tolerance=±1%, componentlink1description=Datasheet, componentlink1url=http://www.koaspeer.com/catimages/Products/RK73H/RK73H.pdf, componentlink2description="DigiKey Link", componentlink2url=https://www.digikey.com/en/products/detail/koa-speer-electronics-inc/RK73H1JTTD1200F/9844960, Composition="Thick Film", Features="Automotive AEC-Q200", Height - Seated (Max)="0.022\" (0.55mm)", lastupdated="7/25/2024 9:43:06 AM", Lifecycle Status=Active, Minimum Order=1, Number of Terminations=2, Package / Case="0603 (1608 Metric)", packaging=CutTape, Part Number=RK73H1JTTD1200F, Part Status=Active, partid=15761, price=0.01, Resistance="120 Ohms", series=RK73H, Size / Dimension="0.063\" L x 0.031\" W (1.60mm x 0.80mm)", Supplier 1=DigiKey
S1 S2: "Switch", Manufacturer_Name="Same Sky", Mouser Part Number=179-TS0925WT160SMTTR, Datasheet Link=https://www.sameskydevices.com/product/resource/ts09.pdf, Height=2.7mm, Manufacturer_Part_Number=TS09-63-25-WT-160-SMT-TR, Mouser Price/Stock=https://www.mouser.co.uk/ProductDetail/CUI-Devices/TS09-63-25-WT-160-SMT-TR?qs=Rp5uXu7WBW%2F4oc%2FgdKTFnw%3D%3D
SB1 SB2: library part CMP-00030-00002-4, "3-way solder bridge mainly for power rail selection"
U1: library part CMP-019-00050-1, "Switching Regulator"
U2: library part CMP-019-00059-1, "Synchronous Buck Regulator Ultrasonic 28V I/P Adjustable O/P 8A 24-Pin PowerPAK MLP44 T/R", Max Operating Temperature=105°C, Max Power Dissipation=7.75W, Max Supply Voltage=28V, Min Operating Temperature=-40°C, Min Supply Voltage=3V, Output Current=8A, Output Voltage=20V
U4: library part CMP-015-00008-1, "Industrial Grade Can Trx With Vio Pin (Dfn8) Rohs Compliant: Yes", Max Operating Temperature=150°C, Max Supply Voltage=5.5V, Min Operating Temperature=-40°C, Min Supply Voltage=4.5V, Pins=8
Y1 Y2: library part XRCGB48M000F4M00R0, "Crystal or Oscillator", Manufacturer_Name="Murata Electronics", Mouser Part Number=81-XRCGB48M000F4M0R0, Arrow Part Number=XRCGB48M000F4M00R0, Arrow Price/Stock=https://www.arrow.com/en/products/xrcgb48m000f4m00r0/murata-manufacturing, Datasheet Link=https://www.murata.com/products/productdata/8801067466782/SPEC-XRCGB48M000F4M00R0.pdf, Height=0.7mm, Manufacturer_Part_Number=XRCGB48M000F4M00R0, Mouser Price/Stock=https://www.mouser.co.uk/ProductDetail/Murata-Electronics/XRCGB48M000F4M00R0?qs=e%252BE4OD6MgMd07skQ7eZ%2F7Q%3D%3D
z: library part CMP-020-00029-1, "RISC Microcontroller, 32-Bit, FLASH, CORTEX-M7 CPU, 480MHz, CMOS, PQFP100", Frequency=480MHz, Max Operating Temperature=85°C, Max Supply Voltage=3.6V, Min Operating Temperature=-40°C, Min Supply Voltage=1.71V, Interface="Ethernet, I2C, I2S, IrDA, LIN, SPI, UART, USART, USB", RAM Size=1MB

## Free pads (board coordinates)
  round 5 hole 3.2: 14(78.8,69.4) 14(78.8,99.4) 14(108.8,69.4) 14(108.8,99.4)

## Via types
v1: diameter 0.5, hole 0.3, L1(SIG) to L8(SIG), tented both sides, 353 vias
v2: diameter 0.5, hole 0.3, L1(SIG) to L8(SIG), 2 vias

## Nets (pads, with @x,y where several pads share a name; then routed paths per layer and width w, separated by ;. In a path a pad name is that pad's centre, name@x,y a point inside that pad or via, vN(x,y) a via of type N, cw(c..) or ccw(c..) an arc to the next point about the centre after c; other vN are vias at no path point)
+3V3: C1.2 C3.2 C5.2 C6.2 C7.2 C9.2 C11.2 C12.2 C13.2 C14.2 C19.2 C28.2 C36.2 C44.2 C45.1 C49.1 H1.1 IC2.1 IC2.10 IC7.8 J4.4 L1.2 P6.1 P12.1 R1.1 R2.2 R3.2 R7.2 R24.1 R27.2 R28.2 R30.2 R40.1 R48.2 R49.2 S1.2 SB2.1 U4.5 z.6 z.11 z.20 z.21 z.27 z.50 z.75 z.100 | length 57.1
  L1(SIG) w0.2: 86.075,78.875 86.162,78.962 86.912,78.962 z.100@86.915,78.964 ; C9.2@87.1,92.4 87.106,92.406 87.581,92.406 v1(87.6,92.425) 88.484,92.425 88.49,92.431 z.75@88.49,92.539 ; 90.875,76.55 90.988,76.663 90.988,77.386 z.6@90.99,77.389 ; 93.425,76.525 93.425,76.625 93.488,76.688 93.488,77.386 z.11@93.49,77.389 ; 98,78.2 97.99,78.19 z.20@97.99,77.389 97.992,77.386 97.992,76.658 98.05,76.6 98.05,76.575 ; 98.49,76.109 z.21@98.49,77.389 ; z.50@102.065,90.964 102.637,90.964 102.873,91.2 102.9,91.2 ; 102.834,79.466 103.075,79.225
  L1(SIG) w0.25: U4.5@78.172,75.475 78.172,76.197 v1(78.175,76.2) ; v1@78.2,76.2 C45.1@78.2,77 ; C19.2@84.175,77.325 84.325,77.475 84.325,77.525 85.321,78.521 85.371,78.521 85.525,78.675 85.875,78.675 86.075,78.875 ; R3.2@84.7,82 v1(85.5,82) ; R2.2@84.7,85.3 84.7,85.918 v1(84.705,85.923) ; v1(85.3,106.95) 85.3,107.9 S1.2@85.4,108 ; v1(90.734,75.264) 90.725,75.273 90.725,76.4 90.875,76.55 ; v1(93.011,75.234) 93.011,75.302 93.325,75.616 93.325,75.8 93.425,75.9 93.425,76.525 ; 98,78.2 v1(98,78.5) ; C14.2@98.05,75.925 98.05,76.575 ; C13.2@98.425,74.8 98.502,74.877 98.502,76.097 ; C13.2@98.45,74.8 98.45,74.75 98.525,74.675 98.85,74.675 98.968,74.557 98.968,74.554 99.129,74.393 C28.2@99.129,73.17 ; z.27@102.065,79.464 102.833,79.464 102.834,79.466 ; 102.908,91.2 103.147,91.439 103.439,91.439 C11.2@103.5,91.5 v1(103.5,92) ; 103.075,79.225 103.185,79.115 103.51,79.115 C7.2@103.561,79.064 ; C7.2@103.55,79.075 103.612,79.013 104.494,79.013 104.498,79.009 104.584,79.009 v1(104.632,78.961) ; v1(104.375,99) 104.4,98.975 R1.1@104.4,98.3
  L1(SIG) w0.3: IC2.1@104.85,76.263 105.099,76.263 IC2.10@105.362,76 C36.2@106.5,76 106.458,76.042 106.458,76.487 105.945,77 v1(105.9,77)
  L1(SIG) w0.5: SB2.1@111.5,91.7 111.936,91.7 v1@112.637,90.999
  L5(PWR) w0.5: v1(72.2,74.8) v1(73.4,74.8)
  L8(SIG) w0.2: R7.2@75.4,62.1 75.5,62.2 v1(75.5,63.1)
  L8(SIG) w0.25: H1.1@84.924,105.824 84.924,106.634 85.29,107 v1@85.3,107 ; R40.1@92.4,78.6 92.4,77.4 93.02,76.78 v1@93.02,75.243 ; C44.2@93.56,92.005 93.575,92.005 93.65,92.08 J4.4@93.65,93.6 ; v1(95.968,88.899) 95.97,88.897 IC7.8@95.97,88.07 ; IC7.8@95.97,87.6 IC7.8@95.97,88.07 ; R24.1@97.6,85.4 98.1,85.4 98.373,85.673 98.373,88.227 98,88.6 C49.1@97.6,88.6 96.719,88.6 96.414,88.295 96.195,88.295 IC7.8@95.97,88.07 ; v1(102.839,101.409) 102.848,101.4 R27.2@103.5,101.4 ; v1(102.9,97.2) 102.948,97.152 103.111,97.152 103.238,97.025 103.375,97.025 R48.2@103.5,96.9 ; R30.2@103.5,94.6 104.136,93.964 106.264,93.964 v1(107.4,95.1) ; R49.2@103.5,99.1 103.6,99 v1(104.375,99) ; v1(103.6,104.8) R28.2@103.6,106.2
  L8(SIG) w0.5: v1(93.2,94.8) 93.55,94.45 93.55,93.7 J4.4@93.65,93.6
  other v1: 74.075,71.775 74.825,71.775 99.129,74.329 74.6,74.8 73.4,75.9 85,78.2 112.65,91.012
+3V3_IMU: C8.2 C21.2 C30.2 C34.2 IC1.5 IC4.5 IC4.8 | length 2.9
  L1(SIG) w0.25: IC4.5@109,82 109.775,82 110.5,82.725 v1@110.5,83.776
  other v1: 110.5,83.7 110.5,84.5 110.5,85.3
+5V: C2.2 C4.2 C20.2 C35.2 C40.2 C41.2 C42.1 D3.1 D4.1 D8.1 IC1.1 IC3.3 IC3.19 IC3.21 IC3.24 J13.1 J14.1 J15.1 LS1.1 P5.1 P11.1 R5.2 R6.2 SB2.3 U1.3 U4.3 | length 51
  L1(SIG) w0.3: v1(72.5,80.7) 72.8,80.4 74.8,80.4 75.2,80.8 75.25,80.8 75.3,80.85 C35.2@75.3,80.9 75.324,80.924 75.324,82.369 IC3.3@75.376,82.421 ; IC3.24@76.676,88.271 76.676,89.187 76.9,89.411 C40.2@76.9,89.9 76.95,89.95 76.95,90.466 77.233,90.749 v1(77.705,90.749) ; IC3.21@78.626,88.271 78.626,89.776 78.7,89.85 C41.2@78.7,89.9 78.75,89.95 78.75,90.207 79.152,90.61 80.082,90.61 80.482,90.209 80.482,89.818 v1(80.5,89.8) 80.446,89.8 80.346,89.7 80.338,89.7 79.926,89.288 IC3.19@79.926,88.271 ; U4.3@81.028,74.825 v1(81.873,74.825) 82.036,74.988 C42.1@82.694,74.988 ; C42.1@82.705,74.999 C42.1@82.755,74.949
  L1(SIG) w0.5: v1(111.095,105.393) 111.1,105.388 J15.1@111.1,104.1 ; SB2.3@111.5,94.7 111.651,94.7 112.177,94.173 112.627,94.173 v1(113.3,93.5)
  L5(PWR) w0.3: 72.325,78.45 78.375,78.45 81.835,74.991 81.835,74.863 v1(81.873,74.825)
  L5(PWR) w0.5: 73.1,92.3 76.12,92.3 v1@77.671,90.749 ; v1(77.705,90.749) 79.551,90.749 v1(80.5,89.8) ; v1(112.111,89.315) 113.785,89.315 113.9,89.2
  L8(SIG) w0.2: R5.2@72.1,62.1 72.1,63.05 72.45,63.4 72.6,63.4 72.85,63.65 U1.3@72.85,63.8 ; R6.2@105.9,79 106.507,79 106.805,78.702 108.998,78.702 109.41,78.29 109.41,78.01 109.15,77.75 IC1.1@109.15,77.45
  L8(SIG) w0.5: D8.1@109.35,87.5 109.4,87.5 109.4,88.2 110.325,89.125 LS1.1@111.475,89.125
  other v1: 70.2,63.6 71.3,63.6 70.2,64.7 71.3,64.7 110.1,76 110.1,76.8 110.1,77.6 113.5,86.1 83.1,94.7 83.9,94.7 83.1,95.5 83.9,95.5
+5VBUCK: C17.2 C18.2 D4.2 J7.1 J8.1 J9.1 J10.1 J11.1 J12.1 L2.2 R10.2 SB1.1 U2.18 | length 29.7
  L8(SIG) w0.2: R10.2@73.3,81.9 73.25,81.9 73.1,82.05 73.1,82.1 72.8,82.4 71.462,82.4 71.3,82.562 71.3,83.2 71.6,83.5 73,83.5 73.46,83.96 U2.18@73.46,84.5 ; L2.2@79.39,84.32 L2.2@80.998,84.32
  L8(SIG) w0.4: R10.2@73.273,81.873 73.273,78.417 74.023,77.668 81.264,77.668 81.9,78.303 81.9,78.75 C17.2@82.35,79.2 ; v1(112.2,74.5) 112.227,74.5 112.277,74.45 J8.1@113.7,74.45 ; v1(112.488,81.938) 112.5,81.95 J9.1@113.7,81.95 ; v1(113.695,105.139) 113.7,105.134 J12.1@113.7,104.45 ; J7.1@113.7,66.95 113.8,67.05 114.65,67.05 v1(115.3,67.7) ; J10.1@113.7,89.45 114.189,89.45 114.289,89.55 114.289,90.689 v1(114.3,90.7) ; J11.1@113.8,96.9 115.023,96.95 115.073,97 v1(115.1,97)
  other v1: 85.7,73.6 85,74 85.7,74.3 83.4,81.2 83.4,81.9 83.4,82.6 83.4,83.3 83.4,84.1
+5VUSB: C10.2 D1.1 D3.2 J3.A4 J3.B4
  other v1: 90.7,99.6 96.1,100 91.2,100.2 95.4,100.3
+VBATT: C23.2 C24.2 C25.2 C29.2 C43.2 C48.2 F1.1 F2.1 F3.1 J1.1 J5.1 J5.9 J6.1 P4.1 P10.1 R11.1 R19.2 SB1.3 U2.1-2-26 U2.15 U2.22 | length 9.6
  L1(SIG) w0.3: R19.2@87,75.6 87.683,75.6 88.3,74.983 v1(88.3,74.3)
  L8(SIG) w0.25: U2.22@73.46,86.55 73.48,86.57 74.002,86.57 74.186,86.754
  L8(SIG) w0.3: R11.1@70.7,81.9 70.7,81.137 72.1,79.737 v1(72.1,79.2) ; v1(74.6,81.2) 74.6,81.85 74.8,82.05 C48.2@75.1,82.05 75.023,82.127 U2.15@75.023,84.038
  other v1: 88.1,63.475 78,63.5 80.9,63.5 90.9,63.5 100.6,63.6 100.6,64.4 88.1,64.45 78,64.5 80.9,64.5 90.9,64.5 88.9,65.1 90.1,65.1 98.2,65.1 99,65.1 99.8,65.1 100.6,65.1 78.9,65.2 80.1,65.2 109.9,66.3 110.8,66.3 111.7,66.3 110.8,67 111.7,67 88.3,72.4 88.3,73.3 73.1,91.4 74,91.4 72.4,104.025 73.5,104.025 74.6,104.025 75.6,104.025 72.9,104.925 74.1,104.925 75.2,104.925 72.4,106.025 75.7,106.025 73,107.025 74.1,107.025 75.2,107.025
AUX_MISO: IC3.11 IC7.2 z.17 | length 30.7
  L1(SIG) w0.192: IC3.11@80.576,82.421 80.703,82.294 80.703,81.546 v1@81.141,81.108 ; v1(96.275,76.2) 96.275,76.217 96.495,76.436 z.17@96.495,76.798 ; z.17@96.494,76.799 z.17@96.494,77.383
  L3(SIG) w0.167: v1(81.154,81.095) 81.167,81.083 81.56,81.083 81.95,80.692 v1(81.95,76.475)
  L8(SIG) w0.192: v1(81.95,76.475) 82.344,76.868 87.848,76.868 90.863,79.883 90.863,81.854 91.309,82.3 93.853,82.3 94.446,81.707 94.446,80.654 IC7.2@94.7,80.4 ; IC7.2@94.735,80.4 94.735,78.265 96.447,76.553 96.447,76.436 96.275,76.264 v1(96.275,76.2)
AUX_MOSI: IC3.9 IC7.5 z.16 | length 39.4
  L1(SIG) w0.192: v1(78.3,80.4) 79.276,81.376 IC3.9@79.276,82.421 ; v1@95.7,78.791 95.99,78.501 z.16@95.99,77.389
  L3(SIG) w0.167: v1(77.3,76.9) 78.6,78.2 78.6,80.1 v1(78.3,80.4)
  L8(SIG) w0.192: v1(77.3,76.9) 81.433,76.9 82.133,77.6 87.669,77.6 90.439,80.369 90.439,83.597 92.195,85.353 92.195,85.381 ; IC7.5@92.195,88.3 92.195,85.381 ; v1(95.7,78.8) 95.345,79.155 95.345,82.231 92.195,85.381
AUX_SCK: IC3.10 IC7.6 z.68 | length 27
  L1(SIG) w0.192: IC3.10@79.926,82.421 79.849,82.344 79.849,81.525 80.503,80.871 v1(80.503,80.806) ; v1(91.405,91.371) 91.407,91.374 91.736,91.374 91.99,91.627 z.68@91.99,92.539
  L3(SIG) w0.167: v1(80.503,80.806) 80.503,83 84.566,87.063 92.437,87.063 ; v1(91.405,91.371) 92.07,90.705 92.07,87.43 92.437,87.063 ; v1(93.1,86.4) 92.437,87.063
  L8(SIG) w0.192: v1(93.1,86.4) 93.155,86.455 93.155,86.789 93.176,86.809 93.176,86.871 93.566,87.261 IC7.6@93.566,88.199
BOOT: C22.2 U2.23 | length 1.2
  L8(SIG) w0.2: C22.2@72.3,87.1 72.4,87 U2.23@73.46,87
BOOT0: R4.1 S1.1 z.94 | length 22.4
  L1(SIG) w0.167: R4.1@83.9,100.3 S1.1@85.15,100.3
  L1(SIG) w0.187: S1.1@85.6,100.3 85.6,100.25 85.806,100.044 85.856,100.044 86,99.9 v1(86,99.45) ; z.94@86.915,81.964 88.121,81.964 88.233,81.852 v1(88.317,81.852)
  L8(SIG) w0.187: v1@86,99.5 86,93.1 87,92.1 87,90.2 87.4,89.8 87.4,84 88.317,83.083 v1(88.317,81.852)
BST: C15.2 U1.6 | length 1.5
  L8(SIG) w0.25: C15.2@74.6,67.4 74.639,67.361 74.639,66.11 U1.6@74.75,65.999
BUZZER: R47.1 z.3 | length 22.1
  L1(SIG) w0.2: z.3@89.49,77.389 89.489,76.091 90,75.581 v1(90,75.5)
  L3(SIG) w0.2: v1(90,75.5) 89.981,75.519 89.981,79.12 97.5,86.638 97.5,88.814 99.377,90.691 99.691,90.691 v1(99.7,90.7)
  L8(SIG) w0.2: R47.1@99.1,90.625 99.175,90.7 v1(99.7,90.7)
CAM_IN: C38.1 J13.3 R29.2 | length 71.6
  L1(SIG) w0.25: C38.1@79.4,91.3 80.069,91.3 80.745,90.624 81.399,90.624 81.9,91.125 R29.2@82,91.125 82.359,91.484 83.533,91.484 85.4,93.351 v1(85.4,93.4) ; J13.3@113.725,78.7 116.3,78.7 117.7,80.1 v1(117.7,81.8)
  L3(SIG) w0.25: v1(85.4,93.4) 87.198,95.198 89.251,95.198 90.007,95.954 90.007,97.405 96.161,103.559 115.576,103.559
  L3(SIG) w0.3: 115.576,103.559 117.665,101.471 117.665,81.835 v1(117.7,81.8)
CAN_N: P9.1 R46.1 U4.6 | length 8.5
  L1(SIG) w0.187: P9.1@70.5,76.6 70.622,76.722 74.025,76.722 75.597,75.15 76.55,75.15 76.706,74.994 76.706,74.944 76.825,74.825 U4.6@78.172,74.825
CAN_P: P3.1 R46.2 U4.7 | length 8.3
  L1(SIG) w0.187: P3.1@70.5,74.7 70.893,74.307 71.602,74.307 72.259,73.65 R46.2@76.5,73.65 ; R46.2@76.55,73.65 77.085,74.185 U4.7@78.162,74.185
CC1: J3.A5 R15.2 | length 5.7
  L1(SIG) w0.2: J3.A5@94.95,101.422 94.95,102.85 95.6,103.5 R15.2@99,103.5
CC2: J3.B5 R16.2 | length 5.2
  L1(SIG) w0.2: R16.2@88.4,103.5 88.5,103.4 91.4,103.4 91.95,102.85 J3.B5@91.95,101.422
CLK: IC5.1 J4.5 R51.1 | length 22.2
  L8(SIG) w0.192: R51.1@92.3,92 92.413,92.113 92.413,93.463 92.55,93.6 92.322,93.828 92.322,95.771 94.751,98.2 99.029,98.2 101.587,100.758 102.058,100.758 102.073,100.773 104.081,100.773 106.846,103.538 106.846,103.768 IC5.1@107.016,103.939
CMD: IC6.3 J4.3 R49.1 R52.1 | length 21.7
  L8(SIG) w0.192: R52.1@94.767,91.928 94.767,93.583 94.75,93.6 94.6,93.75 94.6,95.7 96.48,97.58 99.38,97.58 101.9,100.1 R49.1@103.5,100.1 103.605,100.205 104.544,100.205 108.04,103.7 108.746,103.7 108.95,103.904 IC6.3@108.95,104.05
DAT0: IC5.3 J4.7 R22.1 R27.1 | length 28.4
  L8(SIG) w0.192: R22.1@90.5,92 90.35,92.15 90.35,93.6 90.35,96.45 89.662,97.138 89.662,102.464 90.565,103.367 97.633,103.367 98.6,102.4 R27.1@103.5,102.4 103.552,102.452 103.552,103.452 104.229,104.129 105.071,104.129 IC5.3@105.15,104.05
DAT1: IC5.4 J4.8 R25.1 R28.1 | length 29.5
  L8(SIG) w0.192: R25.1@89.2,92 89.25,92.05 89.25,93.6 89.25,94.85 88.588,95.512 88.588,99.888 89.021,100.321 89.021,102.568 93.654,107.2 R28.1@103.6,107.2 103.652,107.148 104.864,107.148 104.946,107.066 104.946,106.76 IC5.4@105.151,106.555
DAT2: IC6.6 J4.1 R26.1 R30.1 | length 28.2
  L8(SIG) w0.192: R26.1@97.4,91.9 97.347,91.953 97.347,92.253 96.95,92.65 96.95,93.6 97.134,93.784 97.995,93.784 100.555,96.344 102.333,96.344 103.077,95.6 R30.1@103.5,95.6 ; R30.1@103.55,95.6 103.704,95.754 103.704,95.938 104.258,96.492 110.347,96.492 111.7,97.845 111.7,105.9 111.253,106.347 111.053,106.347 IC6.6@110.85,106.55
DAT3: IC6.1 J4.2 R48.1 R50.1 | length 24.1
  L8(SIG) w0.192: R50.1@96.1,91.9 95.996,92.004 95.996,93.454 95.85,93.6 96.02,93.77 96.02,95.688 96.691,96.359 99.265,96.359 100.806,97.9 R48.1@103.5,97.9 103.545,97.855 104.936,97.855 105.8,98.718 105.8,100.606 107.694,102.5 110.5,102.5 110.7,102.7 110.7,103.9 IC6.1@110.85,104.05
EN_3V3: R5.1 U1.2 | length 2
  L8(SIG) w0.2: R5.1@73.1,62.1 73.1,62.15 73.25,62.3 73.3,62.3 73.8,62.8 U1.2@73.8,63.8
EN_3V3A: IC1.3 R6.1 | length 1.7
  L8(SIG) w0.192: R6.1@105.9,78 106.006,77.894 107.046,77.894 107.25,77.69 IC1.3@107.25,77.45
EN_5V: R11.2 U2.19 | length 4.4
  L8(SIG) w0.2: R11.2@70.7,82.9 70.75,82.9 70.9,83.05 70.9,83.625 71.166,83.891 72.526,83.891 72.77,84.136 72.77,84.827 72.893,84.95 U2.19@73.46,84.95
ESC_CURR: J5.3 J6.3 z.35 | length 53
  L1(SIG) w0.2: v1(99.4,68.4) 101.571,68.4 103.5,66.471 J5.3@103.5,64.8 103.5,63.6 104.922,62.178 112.209,62.178 116.806,66.775 116.806,68.994 115.2,70.6 112.7,70.6 112.2,70.1 112.2,69.3 112.725,68.775 J6.3@113.725,68.775 ; z.35@102.065,83.464 103.565,83.464 103.729,83.3 v1(103.8,83.3)
  L3(SIG) w0.2: v1(99.4,68.4) 99.4,69.274 101.289,71.163 101.289,77.043 101.638,77.392 101.638,82.338 102.601,83.3 v1(103.8,83.3)
ESC_TELEM: J5.4 J6.4 z.81 | length 77.5
  L1(SIG) w0.2: v1@84.075,88.464 84.082,88.457 84.139,88.457 84.145,88.464 z.81@86.915,88.464 ; J5.4@104.5,64.8 104.5,63.828 105.528,62.8 v1(108.3,62.8) 112.082,62.8 116.264,66.982 116.264,68.636 114.875,70.025 J6.4@113.725,70.025
  L3(SIG) w0.25: v1(84,88.4) 82.4,88.4 79.5,85.5 79.5,79.9 80.8,78.6 80.8,72.3 81.95,71.15 81.95,65.513 85.664,61.8 107.3,61.8 v1(108.3,62.8)
FB_3V3: R7.1 R8.1 U1.1 | length 3.1
  L8(SIG) w0.2: R7.1@74.4,62.1 74.4,62.7 74.6,62.9 74.6,63.65 U1.1@74.75,63.8 R8.1@76,63.8
FB_5V: R10.1 R13.1 U2.17 | length 3
  L8(SIG) w0.2: R13.1@72,82.9 R10.1@73.3,82.9 73.389,82.989 73.704,82.989 74.073,83.357 74.073,83.988 U2.17@74.123,84.038
FC_VOLTAGE: R19.1 R21.2 z.15 | length 12.6
  L1(SIG) w0.2: R21.2@85.7,76.7 87.1,76.7 87.1,77.311 89.389,79.6 93.938,79.6 95.484,78.054 95.484,77.975 95.488,77.971 95.488,77.393 z.15@95.486,77.392
FLASH_CS: IC7.1 z.18 | length 3.5